# Altium PCB PCB_I.PcbDoc
Units mil, origin at the board's own origin, x right, y up, seen from the top; angles counter-clockwise.
Board outline 6000 x 4000 mil, 2 copper layers (Top Layer, Bottom Layer); 8 components, 11 nets, 22 pads, 0 vias.
Unrouted connection lines stored in the file: 11.
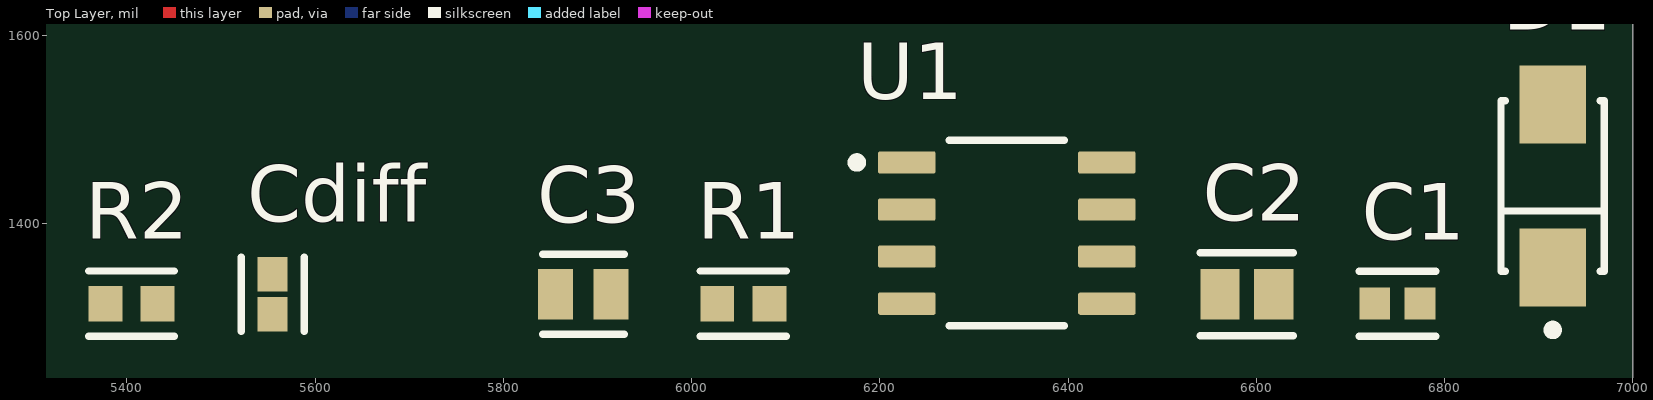
[diagram p0: Top Layer view]
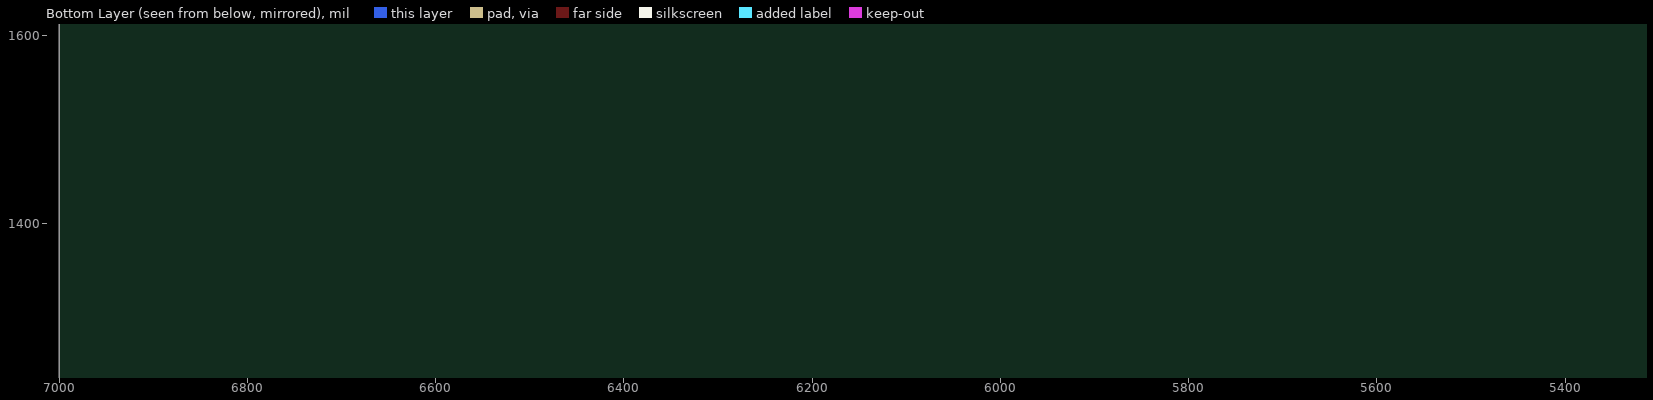
[diagram p1: Bottom Layer view, seen from below]

## Layer stack, top to bottom
Top Solder: solder mask 0.4, Solder Resist, Dk 3.5
Top Layer: signal copper 1.4
Dielectric 1: dielectric 12.6, FR-4, Dk 4.8
Bottom Layer: signal copper 1.4
Bottom Solder: solder mask 0.4, Solder Resist, Dk 3.5

## Board outline
1000,1000 7000,1000 7000,5000 1000,5000

## Design rules (kind name [scope] priority, off if disabled: settings)
Clearance [All] p1: gap=10 ignorepadtopadclearanceinfootprint=FALSE
PolygonConnect [All] p1: connectstyle=Relief reliefconductorwidth=10 reliefentries=4 polygonreliefangle="90 Angle" airgapwidth=10
RoutingVias [All] p1: holewidth=28 width=50 viastyle="Through Hole" minholewidth=28 minwidth=50 maxholewidth=28 maxwidth=50
SolderMaskExpansion [All] p1: expansion=4 istentingtop=FALSE
SupplyNets "Schematic Supply Nets_4" [InNet('+24V_in')] p1: voltage=0.000
SupplyNets "Schematic Supply Nets_3" [InNet('+24V_out')] p2: voltage=0.000
SupplyNets "Schematic Supply Nets_2" [InNet('Vcc')] p3: voltage=0.000
SupplyNets "Schematic Supply Nets_1" [InNet('GND')] p4: voltage=0.000
SupplyNets "Schematic Supply Nets" [InNet('Out')] p5: voltage=0.000
Width [All] p1: maxlimit=10 minlimit=10 preferedwidth=10
30 further rules are at their usual default settings.

## Components (designator, comment, footprint, x,y, rotation, side; value= is the part's Value field where it differs from the comment)
C1 "0603B104K500CT" FP-0603B104K500CT-IPC_C 6750,1315 r0 top
C2 "CL21B105KBFNFNE" FP-CL21-IPC_C 6590,1325 r0 top
C3 "C0805C103J5RAC7210" FP-C0805C-DN-MFG 5885,1325 r0 top value="10,000 pF"
Cdiff "C1608C0G1H103J080AA" FP-C1608-080-0_1-IPC_C 5555,1325 r90 top
D1 "SMAJ33A" FP-SMAJ-MFG 6915,1440 r90 top
R1 "TNPW060310R0BEEA" FP-TNPW0603-e3-IPC_B 6055,1315 r0 top
R2 "TNPW060310R0BEEA" FP-TNPW0603-e3-IPC_B 5405,1315 r0 top
U1 "INA282AIDR" FP-D0008A-MFG 6335,1390 r0 top

## Footprints (in the part's own frame and the unit in brackets; to place one, negate y for a bottom-side part, rotate by r counter-clockwise, add the part's x,y. Pads: shape width x height; smd on the part's side, far side on the other; paste and mask are expansions set on the pad)
FP-0603B104K500CT-IPC_C [mil]
  rect 32.77x33.85 smd paste+0 mask+0: 1(-24.16,0) 2(24.16,0)
  silkscreen extent -41,-34 41,34, body extent -44,-23 44,23, height 10
FP-C0805C-DN-MFG [mm]
  rect 0.95x1.35 smd paste+0 mask+0: 1(-0.75,0) 2(0.75,0)
  silkscreen extent -1.1,-1.07 1.1,1.07, body extent -1.4,-0.85 1.4,0.85, height 0.25
FP-C1608-080-0_1-IPC_C [mil]
  rect 36.66x31.97 smd paste+0 mask+0: 1(-21.28,0) 2(21.28,0)
  silkscreen extent -40,-33 40,33, body extent -44,-22 44,22, height 10
FP-CL21-IPC_C [mil]
  rect 41.52x53.39 smd paste+0 mask+0: 1(-28.57,0) 2(28.57,0)
  silkscreen extent -49,-44 49,44, body extent -53,-32 53,32, height 10
FP-D0008A-MFG [mm]
  rrect17% 1.55x0.6 smd paste+0 mask+0: 1(-2.7,1.905) 2(-2.7,0.635) 3(-2.7,-0.635) 4(-2.7,-1.905) 5(2.7,-1.905) 6(2.7,-0.635) 7(2.7,0.635) 8(2.7,1.905)
  silkscreen extent -4.17,-2.5 1.55,2.5, body extent -3.57,-2.75 3.57,2.75, height 0.25
FP-SMAJ-MFG [mm]
  rect 2.1x1.8 smd paste+0 mask+0: 1(-2.2,0) 2(2.2,0)
  silkscreen extent -4.01,-1.4 2.3,1.4, body extent -3.35,-1.5 3.35,1.5, height 0.25
FP-TNPW0603-e3-IPC_B [mil]
  rect 35.96x37.88 smd paste+0 mask+0: 1(-27.74,0) 2(27.74,0)
  silkscreen extent -46,-35 46,35, body extent -56,-29 56,29, height 10

## Part data
C1: library part CMP-45632-000007-1, "CAP CER 0.1UF 50V X7R 0603", Capacitance=100nF, Case Code (Imperial)=0603, Case Code (Metric)=1608, Dielectric=X7R, Max Operating Temperature=125°C, Min Operating Temperature=-55°C, Tolerance=10%, Voltage Rating=50V, Case/Package=0603, Depth=0.8mm, Lead Free="Lead Free", Length=1.6mm, Packaging="Tape and Reel", Radiation Hardening=No, RoHS Compliant=Yes, Series=-, Voltage Rating (DC)=50V
C2: library part CMP-13271-004196-1, "CL21 Series 0805 1uF 50V ±10% Tolerance X7R Multilayer Ceramic Chip Capacitor", Capacitance=1uF, Case Code (Imperial)=0805, Case Code (Metric)=2012, Dielectric=X7R, Max Operating Temperature=125°C, Min Operating Temperature=-55°C, Package Quantity=1, Tolerance=10%, Voltage Rating=50V, Case/Package=0805, Depth=1.25mm, Height=1.25mm, Length=0.079inch, Mount="Surface Mount", Packaging="Tape and Reel", Radiation Hardening=No, Thickness=0.053inch, Width=0.049inch
C3: library part CMP-2007-01173-3, "CAP CER SMD 0805 .01UF X7R 5% 50", Capacitance="10,000 pF", Manufacturer=KEMET, Package=C0805C-DN, Temperature="-55°C to +125°C", Temperature Characteristic=X7R, Temperature Coefficient=30ppm/°C, Temperature Range High=+125°C, Temperature Range Low=-55°C, Tolerance=0.05, Voltage Rating="50 V", Automotive=No, Category=Cap, ComponentLink2Description=Datasheet, ComponentLink2URL=https://content.kemet.com/datasheets/KEM_C1003_C0G_SMD.pdf, Device Class L1="Passive Components", Device Class L2=Capacitors, Device Class L3="Ceramic Capacitors", Digikey Description="CAP CER SMD 0805 .01UF X7R 5% 50", Height=0.88mm, Ipc Land Pattern Name=CAPC200125X78, Lead Free=Yes, Manufacturer Part Number=C0805C103J5RAC7210, Material=Ceramic, Mouser Description="Cap Ceramic 0.01uF 50V X7R 5% Pad SMD 0805 125C T/R", Octopart=https://octopart.com/c0805c103j5rac7210-kemet-3921106, RoHS=TRUE
Cdiff: library part CMP-08246-003621-1, "Multilayer Ceramic Capacitors 10nF ±5% 50V C0G SMD 0603", Capacitance=10nF, Case Code (Imperial)=0603, Case Code (Metric)=1608, Dielectric=C0G, Dielectric Material=Ceramic, Max Operating Temperature=125°C, Min Operating Temperature=-55°C, Package Quantity=1, Temperature Coefficient=30ppm/°C, Tolerance=5%, Voltage=50V, Case/Package=0603, Construction=Flat, Depth=0.8mm, Height=0.8mm, Lead Free="Lead Free", Length=1.6mm, Mount="Surface Mount", Number of Pins=2, Packaging="Tape and Reel", Radiation Hardening=No, REACH SVHC="No SVHC", RoHS Compliant=Yes, Series=C, Termination=SMD/SMT, Thickness=0.035inch, Voltage Rating=50V, Voltage Rating (DC)=50V, Weight=7.1E-05oz, Width=0.031inch
D1: library part CMP-08607-000030-1, "TVS DIODE 33V 53.3V DO214AC", Breakdown Voltage=36.7V, Clamping Voltage=53.3V, Manufacturer="Littelfuse Inc", Max Junction Temp=+150°C, Package=SMAJ, Peak Pulse Current=7.5A, Peak Pulse Power=400W, Reverse Standoff Voltage=33V, Temperature="-65°C to +150°C", Temperature Range Low=-65°C, Automotive=No, Category=Diode, ComponentLink2Description=Datasheet, ComponentLink2URL=https://www.littelfuse.com/~/media/electronics/datasheets/tvs_diodes/littelfuse_tvs_diode_smaj_datasheet.pdf.pdf, Device Class L1="Circuit Protection", Device Class L2="TVS Diodes", Device Class L3=unset, Digikey Description="TVS DIODE 33V 53.3V DO214AC", Direction=Unidirectional, Height=2.29mm, Lead Free=Yes, Manufacturer Part Number=SMAJ33A, Mouser Description="SMAJ Series 53.3 V 0.4 kW Surface Mount Uni-Directional TVS Diode - DO-214AC", Number Of Channels=1, Octopart=https://octopart.com/smaj33a-littelfuse-350074, RoHS=TRUE, Temperature Range High=+150°C
R1 R2: library part CMP-2000-03695-4, "RES 10 OHM 0.1% 1/10W 0603", Case Code (Imperial)=0603, Case Code (Metric)=1608, Max Operating Temperature=125°C, Max Power Dissipation=100mW, Min Operating Temperature=-55°C, Package Quantity=1, Resistance=10R, Resistance Tolerance=0.1%, Resistor Type="Thin Film", Temperature Coefficient=25ppm/°C, Voltage Rating=75V, Voltage Rating (DC)=50V, Case/Package=0603, Construction=Rectangular, Contact Plating=Tin, Depth=0.85mm, Features="Moisture Resistant", Height=0.45mm, Lead Free="Lead Free", Length=1.6mm, Military Standard=Not, Number of Terminations=2, Packaging="Tape and Reel", Power Rating=100mW, Radiation Hardening=No, RoHS Compliant=Yes, Series=TNPW, Size Code=0603, Technology="THIN FILM", Termination=SMD/SMT, Tolerance=0.1%, Weight=7.1E-05oz, Width=0.8mm
U1: library part CMP-04910-000004-1, "IC CURRENT SHUNT MONITOR 8SOIC", Ambient Temperature Range High=+125°C, Ambient Temperature Range Low=-40°C, Manufacturer="Texas Instruments", Max Junction Temp=+150°C, Max Supply Voltage=18V, Min Supply Voltage=2.7V, Nominal Supply Current=600uA, Package=D0008A, Temperature="-40°C to +125°C", Automotive=No, Category=IC, ComponentLink2Description=Datasheet, ComponentLink2URL=http://www.ti.com/lit/ds/symlink/ina282.pdf, Device Class L1="Integrated Circuits (ICs)", Device Class L2="Power Management ICs", Device Class L3=unset, Digikey Description="IC CURRENT SHUNT MONITOR 8SOIC", Height=1.75mm, Ipc Land Pattern Name=SOIC127P600X175-8, Lead Free=Yes, Manufacturer Part Number=INA282AIDR, Mouser Description="Current & Power Monitors & Regulators Bidirectional,Hi Acc Crnt Shunt Mon", Number Of Outputs=1, Octopart=https://octopart.com/ina282aidr-texas+instruments-18804707, RoHS=TRUE, Standoff Height=0.11mm, Temperature Range High=+125°C, Temperature Range Low=-40°C

## Nets (pads, with @x,y where several pads share a name; then routed paths per layer and width w, separated by ;. In a path a pad name is that pad's centre, name@x,y a point inside that pad or via, vN(x,y) a via of type N, cw(c..) or ccw(c..) an arc to the next point about the centre after c; other vN are vias at no path point)
+24V_in: D1.1
+24V_out: 
GND: C2.2 C3.2 D1.2 U1.2 U1.3 U1.7
NetC1_2: C1.2 U1.6
NetCdiff_1: Cdiff.1 R2.2 U1.1
NetCdiff_2: Cdiff.2 R1.2 U1.8
NetR1_1: R1.1
NetR2_1: R2.1
NetR3_1: U1.5
Out: C3.1
Vcc: C1.1 C2.1
pads on no net: U1.4